# Altium PCB dsPIC33_CPU_ETH_Unit.PcbDoc (part 2 of 2)
Units mm, origin at the board's own origin, x right, y up, seen from the top; angles counter-clockwise.
Board outline 63.98 x 127 mm, 2 copper layers (Top Layer, Bottom Layer), stack 1.036 mm thick; 58 components, 100 nets, 442 pads, 226 vias.
Unrouted connection lines stored in the file: 57.
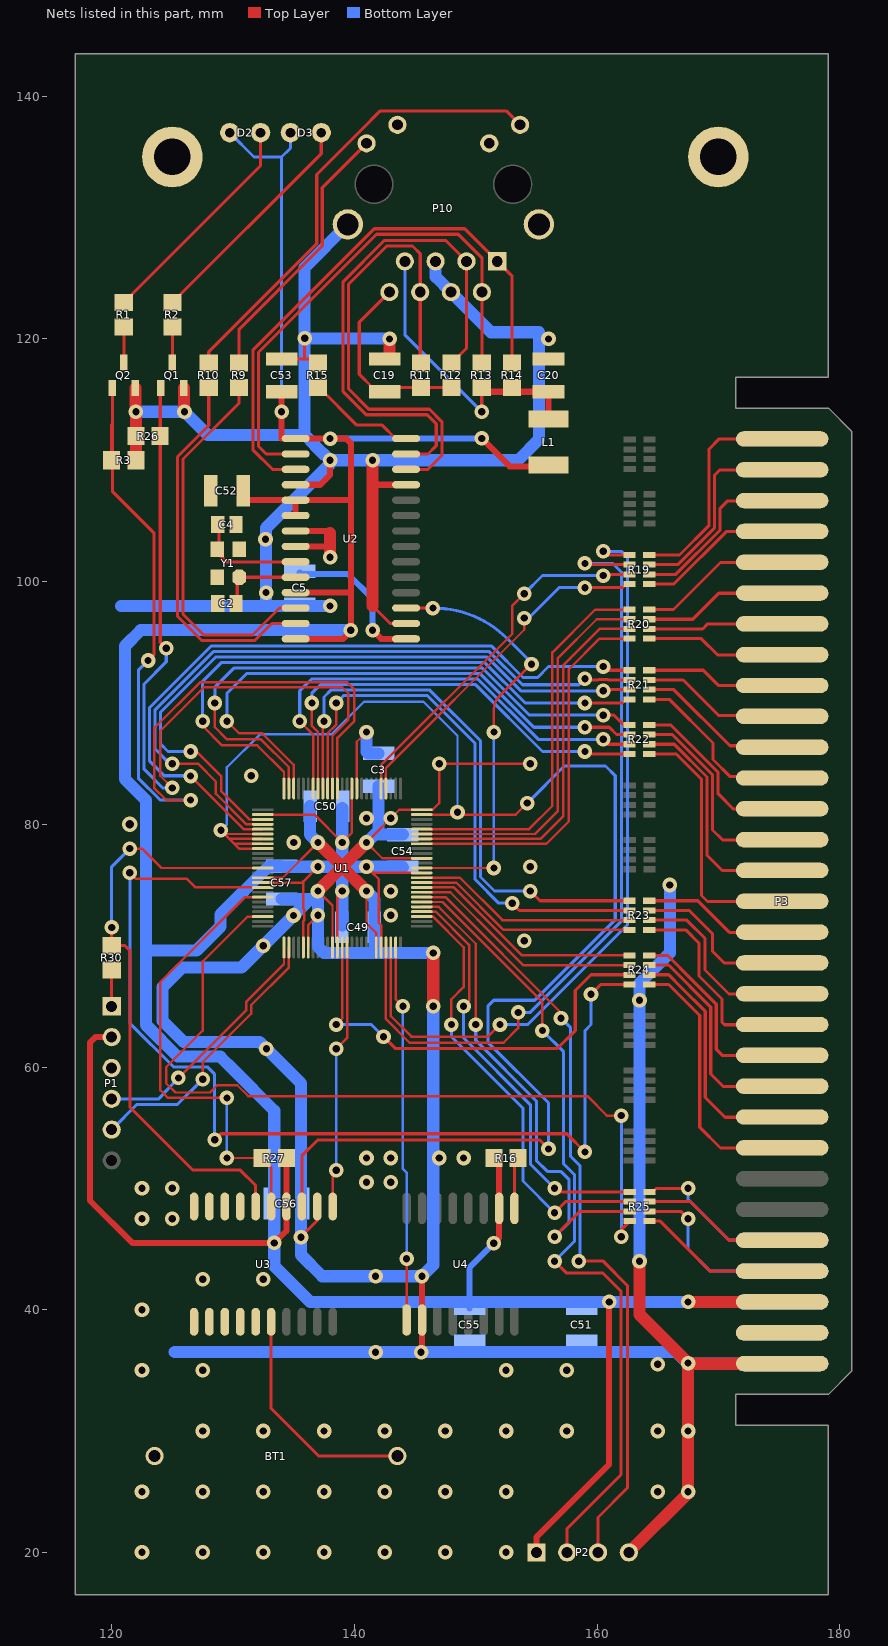
[diagram p2: the nets of this part, all layers, seen from the top]

## Via types
v1: diameter 1.2, hole 0.6, Top Layer to Bottom Layer, 225 vias
v2: diameter 1.27, hole 0.711, Top Layer to Bottom Layer, 1 vias

## Nets (pads, with @x,y where several pads share a name; then routed paths per layer and width w, separated by ;. In a path a pad name is that pad's centre, name@x,y a point inside that pad or via, vN(x,y) a via of type N, cw(c..) or ccw(c..) an arc to the next point about the centre after c; other vN are vias at no path point) (continued)
GND: BT1.2 C2.2 C3.1 C4.1 C5.2 C19.1 C20.1 C49.2 C50.2 C51.2 C52.2 C53.2 C54.2 C55.2 C56.2 C57.2 P1.3 P2.4 P3.1 P3.32 P10.4 P10.5 P10.10 P10.11 P10.13 P10.14 pad.0 Q1.2 Q2.2 R3.2 R15.1 R26.2 U1.15 U1.31 U1.36 U1.45 U1.65 U1.75 U2.2 U2.11 U2.18 U2.21 U2.22 U3.2 U3.7 U3.8 U3.9 U3.10 U3.11 U3.12 U3.13 U3.14 U3.15 U4.10 Y1.2 Y1.4 | length 456.9
  Top Layer w0.2: U1.15@132.45,75.6 134.1,75.6 v1(137,78.5) ; U1.31@136.2,69.85 136.2,71.7 v1(137,72.5) ; v1(137,74.5) 138.2,73.3 U1.36@138.2,69.85 ; v1(141,74.5) 141,71.85 141.8,71.05 U1.45@141.8,69.85 ; U1.65@145.55,77.2 142.3,77.2 v1(141,78.5) 143.7,81.2 U1.75@145.55,81.2 146.45,81.2 147,81.75 v1(147,85) v1(154.5,85)
  Top Layer w0.254: C53.2@134,118.35 135.9,118.35 ; v1@135.6,46.003 136.945,47.348 U3.2@136.945,48.5 ; v1(135.902,120.048) 135.902,118.352 135.9,118.35 ; R15.1@137,118 136.65,118.35 135.9,118.35 ; 141.5,98 142.947,96.553 U2.2@144.262,96.553
  Top Layer w0.5: U2.22@135.162,102.903 137.997,102.903 ; U2.21@135.162,104.173 137.827,104.173 138,104 ; U2.18@135.162,107.983 137.183,107.983 138,108.8 v1(138,110) ; 141.517,107.983 U2.11@144.262,107.983 ; v1@145.575,36.5 U4.10@145.575,39.15 v1@145.575,42.75
  Top Layer w1: v1@121.95,114.05 Q2.2@121.95,115.95 ; R3.2@122,110 R26.2@122,112 v1(122,114) ; v1@125.95,114.05 Q1.2@125.95,115.95 ; v1(137,74.5) 139,76.5 ; v1(137,78.5) 139,76.5 ; 137.997,102.903 138,102.9 ; v1(138,102) 138,102.9 ; v1(141,74.5) 139,76.5 ; v1(141,78.5) 139,76.5 ; 141.5,98 v1(141.5,110) ; C19.1@142.887,118.35 142.9,118.363 v1(142.9,120) ; v1(146.5,65) v1(146.5,69.4) ; P2.4@162.62,20 167.5,24.88 v1(167.5,35.6) ; v1(163.5,44) 163.5,39.6 v1(167.5,35.6) ; P3.1@175.22,35.54 167.56,35.54 v1(167.5,35.6) ; 138,102.9 138,104 138,102.9
  Bottom Layer w0.2: 141.6,69.4 141.65,69.45
  Bottom Layer w0.254: 155.206,119.5 155.326,119.38
  Bottom Layer w0.5: 136.35,73.85 v1(137,74.5)
  Bottom Layer w1: 120.775,98 132.725,98 ; v1@121.95,114.05 v1(122,114) v1(126,114) ; 125.2,36.5 126.8,36.5 131.9,36.5 138.75,36.5 140.25,36.5 v1(141.75,36.5) 143.25,36.5 166.54,36.5 167.5,35.54 P3.32@175.22,35.54 ; v1@125.95,114.05 v1(126,114) ; v1(132.675,103.5) v1@132.7,103.5 ; C57.2@134,73.85 136.35,73.85 130.7,68.2 125.8,68.2 124.2,66.6 124.2,63.797 125.943,62.054 132.196,62.054 v1(132.75,61.5) 135.6,58.65 135.6,48.75 v1(135.6,45.974) 135.6,44.5 137.35,42.75 138.744,42.75 140.247,42.75 v1(141.75,42.75) 143.227,42.75 145.575,42.75 146.5,43.675 v1(146.5,65) ; C50.2@136.35,81.5 136.35,79.15 v1(137,78.5) ; v1(137,74.5) v1(137,72.5) 137,69.9 137.5,69.4 141.6,69.4 v1(146.5,69.4) ; v1(138,98) 132.725,98 ; P10.14@139.458,129.446 135.902,125.89 v1(135.902,120.048) ; v1(141,74.5) 141.65,73.85 C49.2@141.65,71.5 141.65,69.45 ; v1(141,78.5) 141.65,79.15 ; C3.1@142,83.15 142,79.5 141.65,79.15 ; v1(142.9,120) 142.852,120.048 v1(135.902,120.048) ; C54.2@144,79.15 141.65,79.15 ; P10.5@146.697,126.398 146.697,125.128 P10.4@147.967,123.858 151.269,120.556 155.206,120.556 155.206,119.5 155.206,111.706 153.5,110 v1(141.5,110) v1(138,110) ; v1(163.5,44) v1(163.5,65.5) 163.5,66.9 166,69.4 v1(166,75) ; v1(126,114) 127.902,112.098 135.902,112.098 ; 132.725,98 v1(132.725,99.1) 132.725,104.425 138,109.7 v1(138,110) ; 135.902,112.098 v1(135.902,120.048) ; 135.902,112.098 136.7,111.3 136.7,111.255 137.462,110.493 137.507,110.493 v1(138,110)
  other v1: 122.5,20 127.5,20 132.5,20 137.5,20 142.5,20 147.5,20 152.5,20 122.5,25 127.5,25 132.5,25 137.5,25 142.5,25 147.5,25 152.5,25 165,25 167.5,25 127.5,30 132.5,30 137.5,30 142.5,30 147.5,30 152.5,30 157.5,30 165,30 167.5,30 122.5,35 127.5,35 152.5,35 157.5,35 165,35.5 145.5,36.5 122.5,40 127.5,42.5 132.5,42.5 145.566,42.75 122.5,47.5 125,47.5 122.5,50 125,50 141,50.5 143,50.5 141,52.5 143,52.5 147,52.5 149,52.5 132.495,69.995 154,70.4 134.985,72.485 143,72.5 143,74.5 154.5,76.5 135,78.5 141,80.5 143,80.5 131.5,84 156,120
  other v2: 121.5,80
I2C_SCL: P2.3 U1.57 | length 64.6
  Top Layer w0.2: U1.57@145.55,74 147.5,74 157.028,64.472 v1@157.028,63.873
  Top Layer w0.254: v1(158.5,44) 160.5,44 162.5,42 162.5,25.3 160.08,22.88 P2.3@160.08,20
  Bottom Layer w0.254: v1(157.028,64.028) 157.825,63.231 157.825,52.625 158.608,51.842 158.608,44.108 v1(158.5,44)
I2C_SDA: P2.2 U1.56 | length 66.4
  Top Layer w0.2: U1.56@145.55,73.6 147.258,73.6 155.5,65.358 v1(155.5,63)
  Top Layer w0.254: v1(156.5,44) 157.49,43.01 160.49,43.01 161.98,41.52 161.98,26.405 157.54,21.965 P2.2@157.54,20
  Bottom Layer w0.254: v1(155.5,63) 157.25,61.25 157.25,52 158.154,51.096 158.154,45.654 v1(156.5,44)
LED1: Q2.1 R3.1 U1.89 | length 81
  Top Layer w0.2: v1(126.5,82) 124.5,82 123.5,83 123.5,87.916 127.284,91.7 139.4,91.7 140,91.1 140,88.52 138.6,87.12 U1.89@138.6,82.95
  Top Layer w0.254: R3.1@120,110 120,112.928 120.05,112.978 ; v1(123,93.5) 123.5,94 123.5,104 120.05,107.45 120.05,110 120.05,112.978 ; 120.05,112.978 Q2.1@120.05,115.95 120.05,112.978
  Bottom Layer w0.254: v1@122.673,93.173 v1(123,93.5) 122.2,92.7 122.2,83.8 124,82 v1(126.5,82)
LED2: Q1.1 R26.1 U1.90 | length 66.3
  Top Layer w0.2: v1(125,83) 124,84 124,87.7 127.6,91.3 139,91.3 139.5,90.8 139.5,88.6 138.2,87.3 U1.90@138.2,82.95
  Top Layer w0.254: Q1.1@124.05,115.95 124,115.9 R26.1@124,112 124,95 v1(124.5,94.5)
  Bottom Layer w0.254: v1(124.5,94.5) 124.5,93.398 122.673,91.571 122.673,84.527 124.2,83 v1@124.768,83 ; v1@124.768,83 v1(125,83) v1@124.768,83
NetBT1_1: BT1.1 U3.16 | length 19.2
  Top Layer w0.254: U3.16@133.135,39 133.135,31.865 137.06,27.94 BT1.1@143.54,27.94
NetC2_1: C2.1 U2.24 Y1.1 | length 7
  Top Layer w0.254: C2.1@130.35,98.2 130.35,100.363 U2.24@135.162,100.363
NetC4_2: C4.2 U2.23 Y1.3 | length 8.8
  Top Layer w0.254: Y1.3@128.712,102.368 129.447,101.633 U2.23@135.162,101.633 ; Y1.3@128.712,102.663 128.85,102.801 C4.2@128.85,104.7
NetC5_1: C5.1 U2.1 | length 13.1
  Top Layer w0.5: v1@141.5,96.1 v1(141.5,96) 142.217,95.283 U2.1@144.262,95.283
  Bottom Layer w0.254: v1@141.2,96.1 141.5,96.1 v1@141.6,96.1
  Bottom Layer w0.5: C5.1@135.5,100.75 135.5,100.625 139.475,100.625 141.5,98.6 141.5,96.1 v1(141.5,96)
NetC19_2: C19.2 P10.8 R11.1 R12.1 | length 16.1
  Top Layer w0.254: P10.8@142.887,123.858 140.4,121.371 140.4,117.1 141.5,116 142.537,116 142.823,115.714 143.11,116 145.427,116 R12.1@148,116
NetC20_2: C20.2 L1.2 P10.7 R13.1 R14.1 | length 24.8
  Top Layer w0.254: v1(150.5,114) R13.1@150.5,116 ; R13.1@150.634,116 R13.1@150.984,115.65
  Top Layer w0.5: R13.1@150.984,115.65 153.016,115.65 C20.2@156,115.65 L1.2@156,113.4
  Bottom Layer w0.254: P10.7@144.157,126.398 144.157,120.343 150.167,114.333 v1@150.634,114.333
NetD2_2: D2.2 R1.1 | length 18.7
  Top Layer w0.254: R1.1@121,123 132.27,134.27 D2.2@132.27,137
NetD3_2: D3.2 R2.1 | length 19.1
  Top Layer w0.254: R2.1@125,123 137.27,135.27 D3.2@137.27,137
NetP1_1: P1.1 R30.1 | length 3
  Top Layer w0.254: P1.1@120,65 R30.1@120,68.05
NetP3_2: P3.2 P3.33
NetP10_9: P10.9 R10.2 | length 38.6
  Top Layer w0.254: R10.2@128,118 128,118.942 136.9,127.842 136.9,133.559 140.556,137.215 142.141,138.8 152.507,138.8 P10.9@153.657,137.65
NetP10_12: P10.12 R9.2 | length 22.5
  Top Layer w0.254: R9.2@130.5,118 130.5,120.8 137.354,127.654 137.354,132.473 P10.12@141.007,136.126
NetQ1_3: Q1.3 R2.2 | length 3
  Top Layer w0.254: Q1.3@125,118.05 R2.2@125,121
NetQ2_3: Q2.3 R1.2 | length 3
  Top Layer w0.254: Q2.3@121,118.05 R1.2@121,121
NetR9_1: R9.1 U2.26 | length 31.5
  Top Layer w0.254: R9.1@130.5,116 130.5,114.725 125.875,110.1 125.875,97.325 127.6,95.6 131.608,95.6 133.831,97.823 U2.26@135.162,97.823
NetR10_1: R10.1 U2.27 | length 31.1
  Top Layer w0.254: R10.1@128,116 128,112.867 125.421,110.288 125.421,97.137 127.412,95.146 131.796,95.146 133.203,96.553 U2.27@135.162,96.553
NetR16_1: R16.1 U4.1 | length 3.8
  Top Layer w0.254: U4.1@153.195,48.35 R16.1@153.195,52.195
NULL_A: P3.8 R24.1 R24.8 U1.17 | length 108.4
  Top Layer w0.2: v1@121.85,75.65 v1(121.5,76) 122,75.5 126.2,75.5 126.9,74.8 U1.17@132.45,74.8
  Top Layer w0.254: v1(128.5,54) 129,54.5 157.5,54.5 v1(159,53) ; v1(159.5,66) 160.3,66.8 R24.8@162.675,66.8 ; R24.1@164.3,66.8 165.9,66.8 166.4,66.3 168.462,64.238 168.462,55.038 170.18,53.32 P3.8@175.22,53.32
  Bottom Layer w0.254: v1(121.5,76) 121.5,63.6 125.088,60.012 127.888,60.012 128.462,59.438 v1@128.462,54 ; v1(159,53) 159,63 159.5,63.5 v1(159.5,66)
NULL_B: P3.9 R24.2 R24.7 U1.38 | length 55.9
  Top Layer w0.2: v1(138.5,63.5) 139,64 U1.38@139,69.85
  Top Layer w0.254: v1(142.4,62.5) 143.362,61.538 154.898,61.538 154.9,61.54 154.902,61.538 156.738,61.538 158.2,63 158.2,66.3 159.5,67.6 R24.7@162.675,67.6 ; R24.2@164.3,67.6 165.9,67.6 166.9,66.6 168.916,64.584 168.916,57.484 170.54,55.86 P3.9@175.22,55.86
  Bottom Layer w0.254: v1(138.5,63.5) 141.4,63.5 v1(142.4,62.5)
NULL_C: P3.10 R24.3 R24.6 U1.58 | length 37.9
  Top Layer w0.2: U1.58@145.55,74.4 147.9,74.4 152.3,70 153.9,68.4 R24.6@162.675,68.4
  Top Layer w0.254: R24.3@164.3,68.4 165.9,68.4 169.37,64.93 169.37,59.43 170.4,58.4 P3.10@175.22,58.4
NULL_D: P3.11 R24.4 R24.5 U1.59 | length 36
  Top Layer w0.2: U1.59@145.55,74.8 148.2,74.8 153.8,69.2 R24.5@162.675,69.2
  Top Layer w0.254: R24.4@164.3,69.2 165.8,69.2 167.9,67.1 169.824,65.176 169.824,61.476 170.36,60.94 P3.11@175.22,60.94
NULL_E: P3.12 R23.1 R23.8 U1.60 | length 35.6
  Top Layer w0.2: U1.60@145.55,75.2 148.4,75.2 152.3,71.3 R23.8@162.675,71.3
  Top Layer w0.254: R23.1@164.3,71.3 167.3,71.3 168.4,70.2 168.4,67.5 170.3,65.6 170.3,63.7 170.52,63.48 P3.12@175.22,63.48
NULL_F: P3.13 R23.2 R23.7 U1.61 | length 33.5
  Top Layer w0.2: U1.61@145.55,75.6 148.7,75.6 152.2,72.1 R23.7@162.675,72.1
  Top Layer w0.254: R23.2@164.3,72.1 167.4,72.1 168.9,70.6 168.9,68 170.88,66.02 P3.13@175.22,66.02
NULL_G: P3.14 R23.3 R23.6 U1.91 | length 59.2
  Top Layer w0.2: U1.91@137.8,82.95 137.8,87.5 138.5,88.2 v1(138.5,90)
  Top Layer w0.254: v1(153,73.5) 153.6,72.9 R23.6@162.675,72.9 ; R23.3@164.3,72.9 167.6,72.9 169.5,71 169.5,69.56 170.5,68.56 P3.14@175.22,68.56
  Bottom Layer w0.25: 146.024,90.6 149.935,86.689 149.935,75.465 151.9,73.5 v1(153,73.5)
  Bottom Layer w0.254: v1(138.5,90) 139.1,90.6 146.024,90.6
NULL_H: P3.15 R23.4 R23.5 U1.92 | length 58.7
  Top Layer w0.2: U1.92@137.4,82.95 v1@137.4,88.5
  Top Layer w0.254: v1(154.5,74.5) 155.3,73.7 R23.5@162.675,73.7 ; R23.4@164.3,73.7 168.299,73.7 170.899,71.1 P3.15@175.22,71.1
  Bottom Layer w0.25: 146.212,91.054 150.389,86.877 150.389,75.653 151.542,74.5 v1(154.5,74.5)
  Bottom Layer w0.254: v1(137.5,88.5) 137.5,90.5 138.054,91.054 146.212,91.054
PGEC1: P1.5 U1.27 | length 23
  Top Layer w0.2: v1(127.5,59) 127.5,60.4 131.5,64.4 131.5,65.1 134.6,68.2 U1.27@134.6,69.85
  Bottom Layer w0.254: P1.5@120,54.84 122.086,56.926 125.426,56.926 v1(127.5,59)
PGED1: P1.4 U1.26 | length 20.6
  Top Layer w0.2: v1(125.5,59.1) 131.1,64.7 131.1,65.4 134.2,68.5 U1.26@134.2,69.85
  Bottom Layer w0.254: P1.4@120,57.38 123.88,57.38 v1(125.5,59.1)
POS_A: P3.24 R20.1 R20.8 U1.68 | length 42.9
  Top Layer w0.2: U1.68@145.55,78.4 155.821,78.4 157.675,80.254 157.675,92.775 160.2,95.3 R20.8@162.675,95.3
  Top Layer w0.254: R20.1@164.3,95.3 168.6,95.3 169.94,93.96 P3.24@175.22,93.96
POS_B: P3.25 R20.2 R20.7 U1.69 | length 42.7
  Top Layer w0.2: U1.69@145.55,78.8 155.35,78.8 157.225,80.675 157.225,93.125 160.2,96.1 R20.7@162.675,96.1
  Top Layer w0.254: R20.2@164.3,96.1 168.7,96.1 169.12,96.52 P3.25@175.26,96.52
POS_C: P3.26 R20.3 R20.6 U1.70 | length 43.6
  Top Layer w0.2: U1.70@145.55,79.2 154.875,79.2 156.775,81.1 156.775,93.7 159.975,96.9 R20.6@162.675,96.9
  Top Layer w0.254: R20.3@164.3,96.9 167.9,96.9 170.04,99.04 P3.26@175.22,99.04
POS_D: P3.27 R20.4 R20.5 U1.71 | length 44.6
  Top Layer w0.2: U1.71@145.55,79.6 154.4,79.6 156.325,81.525 156.325,94.175 159.85,97.7 R20.5@162.675,97.7
  Top Layer w0.254: R20.4@164.3,97.7 166.3,97.7 170.18,101.58 P3.27@175.22,101.58
POS_D_A: P3.16 R22.1 R22.8 U1.93 | length 58.5
  Top Layer w0.2: v1(136.5,90) 136.5,88.1 137,87.6 U1.93@137,82.95
  Top Layer w0.254: v1(159,86) 159.2,85.8 R22.8@162.675,85.8 ; R22.1@164.3,85.8 166.525,85.8 168.613,83.712 168.613,74.127 169.1,73.64 P3.16@175.22,73.64
  Bottom Layer w0.254: v1(136.5,90) 136.5,90.8 137.208,91.508 149.998,91.508 155.506,86 v1(159,86)
POS_D_B: P3.17 R22.2 R22.7 U1.94 | length 57.3
  Top Layer w0.2: v1(135.5,88.5) 136.6,87.4 U1.94@136.6,82.95
  Top Layer w0.254: v1(160.5,87) 160.9,86.6 R22.7@162.675,86.6 ; R22.2@164.3,86.6 166.367,86.6 169.067,83.9 169.067,77.446 170.333,76.18 P3.17@175.22,76.18
  Bottom Layer w0.254: v1(135.5,88.5) 135.5,91 136.462,91.962 150.186,91.962 155.148,87 v1(160.5,87)
POS_D_C: P3.18 R22.3 R22.6 U1.98 | length 64.3
  Top Layer w0.2: v1(129.5,88.5) 130.5,87.5 132.4,87.5 135,84.9 U1.98@135,82.95
  Top Layer w0.254: v1(159,88) 161,88 161.6,87.4 R22.6@162.675,87.4 ; R22.3@164.3,87.4 166.209,87.4 169.521,84.088 169.521,79.532 170.333,78.72 P3.18@175.22,78.72
  Bottom Layer w0.254: v1(129.5,88.5) 129.5,90.8 131.116,92.416 150.374,92.416 154.79,88 v1(159,88)
POS_D_D: P3.19 R22.4 R22.5 U1.99 | length 64.1
  Top Layer w0.2: v1(128.5,90) 128.5,88 129.5,87 132.3,87 134.6,84.7 U1.99@134.6,82.95
  Top Layer w0.254: v1(160.5,89) 161.4,89 162.2,88.2 R22.5@162.675,88.2 ; R22.4@164.3,88.2 166.051,88.2 169.975,84.276 169.975,82.508 171.223,81.26 P3.19@175.22,81.26
  Bottom Layer w0.254: v1(128.5,90) 128.5,91.3 130.07,92.87 150.562,92.87 154.432,89 v1(160.5,89)
POS_D_E: P3.20 R21.1 R21.8 U1.100 | length 65
  Top Layer w0.2: v1(127.5,88.5) 127.5,88.1 129.1,86.5 132,86.5 134.2,84.3 U1.100@134.2,82.95
  Top Layer w0.254: v1(159,90) 162.1,90 162.4,90.3 R21.8@162.675,90.3 ; R21.1@164.3,90.3 165.95,90.3 169.55,86.7 169.55,85.343 170.968,83.925 175.095,83.925 P3.20@175.22,83.8
  Bottom Layer w0.254: v1(127.5,88.5) 127.5,91.8 129.024,93.324 150.75,93.324 154.074,90 v1(159,90)
POS_D_F: P3.21 R21.2 R21.7 U1.3 | length 68.5
  Top Layer w0.2: v1@127,86 129.046,83.954 129.046,82.712 131.358,80.4 U1.3@132.45,80.4
  Top Layer w0.254: v1(126.5,86) v1@127,86 ; v1@161,91 161.1,91.1 R21.7@162.675,91.1 ; R21.2@164.3,91.1 166.325,91.1 170.95,86.475 175.085,86.475 P3.21@175.22,86.34
  Bottom Layer w0.254: v1(126.5,86) 124.64,86 124.038,86.602 124.038,89.254 128.562,93.778 150.938,93.778 153.716,91 v1(160.5,91)
POS_D_G: P3.22 R21.3 R21.6 U1.4 | length 70.1
  Top Layer w0.2: v1@124.793,85 127.1,85 128.592,83.508 128.592,82.524 131.116,80 U1.4@132.45,80
  Top Layer w0.254: v1@159,91.912 159.012,91.9 160.089,91.9 160.116,91.927 160.884,91.927 160.911,91.9 R21.6@162.675,91.9 ; R21.3@164.3,91.9 167.1,91.9 170.025,88.975 175.125,88.975 P3.22@175.22,88.88
  Bottom Layer w0.254: v1(125,85) 124.793,85 123.584,86.209 123.584,89.442 128.374,94.232 151.126,94.232 153.858,91.5 158.5,91.5 v1(159,92)
POS_D_H: P3.23 R21.4 R21.5 U1.5 | length 70.6
  Top Layer w0.2: v1(126.5,83.974) 130.874,79.6 U1.5@132.45,79.6
  Top Layer w0.254: v1@160.5,92.7 R21.5@162.675,92.7 ; R21.4@164.3,92.7 168.75,92.7 170,91.45 175.19,91.45 P3.23@175.22,91.42
  Bottom Layer w0.254: v1(126.5,83.974) 126.5,84 124.339,84 123.13,85.209 123.13,89.63 128.186,94.686 151.314,94.686 153.896,92.104 155.104,92.104 156,93 v1(160.5,93)
POS_E: P3.28 R19.1 R19.8 U1.79 | length 41.3
  Top Layer w0.2: U1.79@142.6,82.95 142.6,84.637 154,96.037 v1(154,97)
  Top Layer w0.254: v1(159,99.5) 162.1,99.5 162.4,99.8 R19.8@162.675,99.8 ; R19.1@164.3,99.8 166.326,99.8 170.646,104.12 P3.28@175.22,104.12
  Bottom Layer w0.254: v1(154,97) 154.36,97 156.86,99.5 v1(159,99.5)
POS_F: P3.29 R19.2 R19.7 U1.80 | length 44.8
  Top Layer w0.2: U1.80@142.2,82.95 142.2,84.879 153.024,95.703 153.024,98.024 v1(154,99)
  Top Layer w0.254: v1(160.5,100.5) 160.6,100.6 R19.7@162.675,100.6 ; R19.2@164.3,100.6 166.484,100.6 170.143,104.259 170.143,106.043 170.76,106.66 P3.29@175.22,106.66
  Bottom Layer w0.254: v1(154,99) 155.5,100.5 v1(160.5,100.5)
POS_G: P3.30 R19.3 R19.6 U1.47 | length 83.5
  Top Layer w0.2: U1.47@142.6,69.85 142.6,63.958 144.558,62 152.3,62 153.5,63.2 v1(153.5,64.5)
  Top Layer w0.254: v1(159,101.5) 159.088,101.412 159.1,101.4 160.089,101.4 160.116,101.427 160.884,101.427 160.911,101.4 R19.6@162.675,101.4 ; R19.3@164.3,101.4 166.642,101.4 169.689,104.447 169.689,108.789 170.1,109.2 P3.30@175.22,109.2
  Bottom Layer w0.254: v1(153.5,64.5) 154.494,64.5 162,72.006 162,100.8 161.3,101.5 v1(159,101.5)
POS_H: P3.31 R19.4 R19.5 U1.48 | length 83
  Top Layer w0.2: U1.48@143,69.85 143,64.2 144.7,62.5 151,62.5 v1(152,63.5)
  Top Layer w0.254: v1(160.5,102.5) 160.8,102.2 R19.5@162.675,102.2 ; R19.4@164.3,102.2 166.8,102.2 169.235,104.635 169.235,110.935 170.04,111.74 P3.31@175.22,111.74
  Bottom Layer w0.254: v1(152,63.5) 154.3,63.5 162.5,71.7 162.5,102 162,102.5 v1(160.5,102.5)
RBIAS: R15.2 U2.14 | length 9.3
  Top Layer w0.254: R15.2@136.664,116 137.1,116 140.2,112.9 142.288,112.9 143.395,111.793 U2.14@144.262,111.793
RESET: R30.2 U1.13 U3.6 | length 49.5
  Top Layer w0.2: v1(121.5,78) 122.5,78 124.1,76.4 U1.13@132.45,76.4
  Top Layer w0.254: R30.2@120,70 121.1,70 121.5,69.6 121.5,56.7 126.7,51.5 130.6,51.5 131.865,50.235 U3.6@131.865,48.5 ; R30.2@120,70.05 v1(120,71.5)
  Bottom Layer w0.254: v1(120,71.5) 120,76.5 v1(121.5,78)
SPI_SCK: P3.35 R25.3 R25.6 U1.55 | length 55.7
  Top Layer w0.2: U1.55@145.55,73.2 146.959,73.2 150,70.159 v1(150,63.5)
  Top Layer w0.254: v1(156.5,46) 158.6,48.1 R25.3@162.7,48.1 ; R25.6@164.325,48.1 166.9,48.1 v1(167.5,47.5)
  Bottom Layer w0.254: v1(150,63.5) 150,62.2 155,57.2 155,52.3 155.9,51.4 157,51.4 157.7,50.7 157.7,47.2 v1(156.5,46) ; v1(167.5,47.5) 167.5,45 169.32,43.18 P3.35@175.26,43.18 P3.35@175.24,43.2
SPI_SDI: P3.5 R25.2 R25.7 U1.53 | length 49.1
  Top Layer w0.2: U1.53@145.55,72.4 146.475,72.4 149,69.875 149,66.584 148,65.584 v1(148,63.5)
  Top Layer w0.254: v1(156.5,48) 157.4,48.9 R25.2@162.7,48.9 ; R25.7@164.325,48.9 167.7,48.9 170.88,45.72 P3.5@175.26,45.72
  Bottom Layer w0.254: v1(148,63.5) 148,62.875 148,62.5 153.9,56.6 153.9,50.6 v1(156.5,48)
SPI_SDO: P3.36 R25.1 R25.8 U1.54 | length 48.1
  Top Layer w0.2: U1.54@145.55,72.8 146.717,72.8 149.454,70.063 149.454,65.454 v1(149,65)
  Top Layer w0.254: v1(156.5,50) 156.8,49.7 R25.1@162.7,49.7 ; R25.8@164.325,49.7 164.6,49.7 164.9,50 v1(167.5,50)
  Bottom Layer w0.254: v1(149,65) 149,62.925 149,62.4 154.5,56.9 154.5,52 v1(156.5,50) ; v1(167.5,50) 167.5,49.1 170.88,45.72 P3.36@175.26,45.72
SPI_SEL: P3.4 R25.4 R25.5 U1.23 | length 81.1
  Top Layer w0.2: U1.23@132.437,72.387 131.187,72.387 127.5,68.7 127.5,63 124.5,60 124.5,58.65 125.25,57.9 128.1,57.9 128.7,58.5 130.35,58.5 131.25,57.6 159.2,57.6 160.8,56 v1(162,56)
  Top Layer w0.254: v1(162,46) 162,46.6 R25.4@162.7,47.3 ; R25.5@164.325,47.3 165.2,47.3 169.32,43.18 P3.4@175.26,43.18
  Bottom Layer w0.254: v1(162,46) v1(162,56)
SYS_CLK: U1.63 U2.3 | length 36
  Top Layer w0.2: U1.63@145.55,76.4 v1(151.5,76.4) ; v1(151.5,87.6) 151.5,89.475 cw(c153.005,89.475) 151.941,90.539 ; 151.927,90.527 v1(154.6,93.2)
  Top Layer w0.254: U2.3@144.262,97.823 v1(146.477,97.823) v1@146.5,97.8
  Bottom Layer w0.2: v1(151.5,76.4) v1(151.5,87.6)
  Bottom Layer w0.254: v1(146.477,97.823) cw(c146.477,89.087) 152.655,95.264 154.6,93.319 v1(154.6,93.2)
TIMER_CLK: U1.6 U1.7 U1.8 U1.9 U1.74 U3.3 | length 131.8
  Top Layer w0.2: U1.9@132.45,78 130.5,78 v1(129,79.5) ; U1.8@132.45,78.4 130.1,78.4 v1(129,79.5) ; U1.7@132.45,78.8 129.7,78.8 v1(129,79.5) ; U1.6@132.45,79.2 129.3,79.2 v1(129,79.5) ; U1.74@145.55,80.8 153.3,80.8 v1(154.25,81.75)
  Top Layer w0.254: U3.3@135.675,48.5 135.675,52.675 137,54 155.25,54 v1(156,53.25)
  Bottom Layer w0.2: v1(129,79.5) 129.201,79.701 129.5,80 129.5,84.7 132.215,87.415 138.115,87.415 140.8,90.1 145.7,90.1 148.5,87.3 v1(148.5,81)
  Bottom Layer w0.254: v1(154.25,81.75) 157.3,84.8 160.7,84.8 161.5,84 161.5,72.148 154.852,65.5 151.5,65.5 151,65 151,62.05 156,57.05 v1(156,53.25)
TIMER_INT: R27.1 U1.19 U3.5 | length 38.2
  Top Layer w0.2: v1(129.5,52.5) 132.367,52.5 133.135,51.732 U3.5@133.135,48.5 ; v1(129.5,57.45) 124.65,57.45 124,58.1 124,67 131,74 U1.19@132.45,74
  Bottom Layer w0.2: v1(129.5,52.5) v1(129.5,57.45)
TIMER_SEL: U1.39 U3.1 | length 21.8
  Top Layer w0.2: U3.1@138.215,48.5 138.215,51.215 v1(138.5,51.5) ; v1(138.5,61.5) 139.4,62.4 U1.39@139.4,69.85
  Bottom Layer w0.2: v1(138.5,51.5) v1(138.5,61.5)
TP_IN_N: P10.6 R11.2 U2.12 | length 40.2
  Top Layer w0.254: U2.12@144.262,109.253 146.062,109.253 147.205,110.396 147.205,113.19 146.189,114.206 141.194,114.206 139.525,115.875 139.525,124.525 142.668,127.668 144.792,127.668 145.427,127.033 P10.6@145.427,123.858 R11.2@145.427,118
TP_IN_P: P10.3 R12.2 U2.13 | length 43.6
  Top Layer w0.254: U2.13@144.262,110.523 146.062,110.523 146.751,111.212 146.751,113.002 146.001,113.752 140.977,113.752 139.071,115.658 139.071,124.713 142.48,128.122 147.513,128.122 P10.3@149.237,126.398 149.237,119.237 R12.2@148,118
TPOUT1_N: P10.2 R13.2 U2.16 | length 43.1
  Top Layer w0.254: U2.16@135.162,110.523 132.727,110.523 132.092,111.158 132.092,118.892 141.83,128.63 148.57,128.63 150.507,126.693 P10.2@150.507,123.858 150.507,118.127 R13.2@150.634,118
TPOUT1_P: P10.1 R14.2 U2.17 | length 46.7
  Top Layer w0.254: U2.17@135.162,109.253 133.247,109.253 131.638,110.862 131.638,119.08 141.642,129.084 149.091,129.084 P10.1@151.777,126.398 153,125.175 R14.2@153,118
VCC: C49.1 C50.1 C51.1 C52.1 C53.1 C54.1 C55.1 C56.1 C57.1 D2.1 D3.1 L1.1 P1.2 P2.1 P3.3 P3.34 R16.2 R27.2 U1.2 U1.16 U1.30 U1.37 U1.46 U1.62 U1.86 U2.15 U2.19 U2.20 U2.25 U2.28 U3.4 U4.2 | length 390.9
  Top Layer w0.2: U1.16@132.45,75.2 135.7,75.2 135.8,75.3 ; U1.2@132.45,80.8 136.7,80.8 v1(139,78.5) 139.8,79.3 U1.86@139.8,82.95 ; U1.30@135.8,69.85 135.8,72.027 135.885,72.112 135.885,72.943 135.8,73.029 135.8,75.3 ; v1(137,76.5) 135.8,75.3 ; U1.37@138.6,69.85 138.6,74.1 v1(139,74.5) ; v1(141,76.5) 141.5,76 ; U1.46@142.2,69.85 142.2,71.7 142.009,71.891 142.009,75.491 141.5,76 ; U1.62@145.55,76 141.5,76
  Top Layer w0.254: C53.1@134.124,115.396 C53.1@134.966,115.396 ; 139.585,99.093 139.712,98.966 ; L1.1@155.9,109.5 L1.1@156,109.6
  Top Layer w0.5: P1.2@120,62.46 118.66,62.46 118.2,62 118.2,49 121.7,45.5 v1(133.4,45.5) 134.405,46.505 U3.4@134.405,48.5 R27.2@134.405,52.5 ; C52.1@130.923,107.077 131.287,106.713 133.437,106.713 U2.19@135.162,106.713 ; C53.1@134,115.65 134,111.793 U2.15@135.162,111.793 v1(138,111.793) ; U2.28@135.162,95.283 139.077,95.283 139.712,95.918 v1(139.7,96) 139.712,96 139.712,98.966 139.712,106.713 ; U2.25@135.162,99.093 139.585,99.093 ; U2.20@135.162,105.443 U2.19@135.162,106.713 ; v1@138,111.8 v1(138,111.793) ; v1(150.5,111.8) 152.8,109.5 L1.1@155.9,109.5 ; v1(151.485,45.485) 151.925,45.925 U4.2@151.925,48.35 R16.2@151.925,52.075 ; P2.1@155,20 155,21.25 161,27.25 v1(161,40.64) ; L1.1@155.8,109.6 L1.1@156,109.8 ; U2.19@135.162,106.713 139.712,106.713 ; v1(138,111.793) 139.331,111.793 139.712,111.412 139.712,106.713
  Top Layer w1: v1(167.5,40.64) P3.3@175.26,40.64
  Bottom Layer w0.254: D2.1@129.73,137 131.73,135 134,135 ; D3.1@134.73,137 134.73,135.73 134,135 ; 134,135 v1(134,114) 134,135
  Bottom Layer w0.5: v1@138,111.8 v1(150.5,111.8) ; C55.1@149.5,40.1 149.5,43.5 v1(151.485,45.485)
  Bottom Layer w1: C57.1@134,76.55 132.95,76.55 128.972,72.572 128.972,71.584 126.988,69.6 122.835,69.6 ; C57.1@134.15,76.5 v1(137,76.5) 139,76.5 ; C49.1@139,71.65 v1(139,74.5) ; v1@139,74.45 v1(139,74.5) ; C50.1@139,81.35 v1(139,78.5) 139,76.5 ; v1(139.7,96) 122.4,96 121.1,94.7 121.1,83.725 122.835,81.99 122.835,69.6 ; C54.1@144,76.45 143.95,76.5 v1(141,76.5) 139,76.5 ; P3.34@175.26,40.64 v1(167.5,40.64) v1(161,40.64) 151.925,40.64 136.36,40.64 133.4,43.6 v1(133.4,45.5) 133.4,56.4 130.049,59.751 128.946,60.854 125.446,60.854 122.835,63.465 122.835,69.6 ; v1(139,74.5) 139,76.5
VDD_CORE: C3.2 U1.85 | length 7.7
  Top Layer w0.2: U1.85@140.2,82.95 140.2,86.8 v1(141,87.6)
  Bottom Layer w1: v1(141,87.6) 141,85.984 141.134,85.85 C3.2@142,85.85
WRITEPROTECT: U1.49 U4.9 | length 31.1
  Top Layer w0.2: U1.49@143.4,69.85 143.4,65.6 v1(144,65) ; U4.9@144.305,39.15 v1@144.305,44.2
  Bottom Layer w0.2: v1(144,65) 144,51.6 144.3,51.3 v1(144.3,44.2)
pads on no net: P1.6 P10.15 P10.16 U1.20 U1.40 U1.51 U1.52 U1.64 U1.73 U1.88 U2.5 U3.18 U4.3 U4.4 U4.5 U4.6 U4.11 U4.12 U4.13 U4.14
copper on no net: | length 1.3
  Top Layer w0.4: 143.825,91.054 ccw(c143.625,91.054) 143.825,91.054

## Polygon pours and split planes (outlines as drawn)
GND on Top Layer "Top Layer-No Net" (solid, remove dead copper, pour order 1000): 178.205,17.395 178.205,30.046 170.481,30.046 170.473,30.053 170.473,117.842 178.197,117.842 178.205,117.849 178.205,143 117.5,143 117.5,17.395
GND on Bottom Layer "Top Layer-No Net" (solid, remove dead copper, pour order 1001): 178.205,17.395 178.205,30.046 178.053,30.198 170.466,30.198 170.466,117.834 170.473,117.842 170.481,117.849 178.205,117.849 178.205,143 117.5,143 117.5,17.395

## Keep-outs
Top Layer:
  circle w0.4 net VCC: c154.749,48.751 r0.2
  circle w0.4 net VCC: c139.85,48.925 r0.2
  circle w0.4 net VCC: c133,82.4 r0.2
Keep-Out Layer:
  rectangle: 170.815,30 178.8,30.48
  rectangle: 170.815,116.86 178.7,117.5
  lines w0.5: 178.8,30.48 178.8,16.8 117.3,16.8 117.3,143.2 178.8,143.2 178.8,116.84

## Silkscreen, mask and mechanical layers (free items; w line width, h text height)
Top Overlay:
  lines w0.254: 117,17.546 117,18.054 ; 117.602,18.034 118.11,16.51 ; 117.602,141.986 118.11,143.51 ; 117.856,16.51 118.364,16.51 ; 117.856,143.51 118.364,143.51 ; 118.11,74.271 118.11,16.51 ; 118.11,85.749 118.11,143.51 ; 118.524,17.292 117,17.8 ; 118.524,18.308 117,17.8 ; 118.618,18.034 118.11,16.51 ; 118.618,141.986 118.11,143.51 ; 143.896,17.8 117,17.8 ; 154.104,17.8 181,17.8 ; 179.476,17.292 181,17.8 ; 179.476,18.308 181,17.8 ; 181,17.546 181,18.054
  text "127 (mm)" at 119.024,74.525 h1.52 r90
  text "64 (mm)" at 144.15,16.886 h1.52
Mechanical 1:
  the board outline again, w0.1